# Altium PCB COMMS_ECU_revA.PcbDoc (part 5 of 6)
Units mm, origin at the board's own origin, x right, y up, seen from the top; angles counter-clockwise.
Board outline 370 x 261 mm, 6 copper layers (Top Layer, Mid Layer 1, Mid Layer 2, Mid Layer 3, Mid Layer 4, Bottom Layer), stack 1.538 mm thick; 739 components, 500 nets, 2454 pads, 325 vias.
Unrouted connection lines stored in the file: 1573.
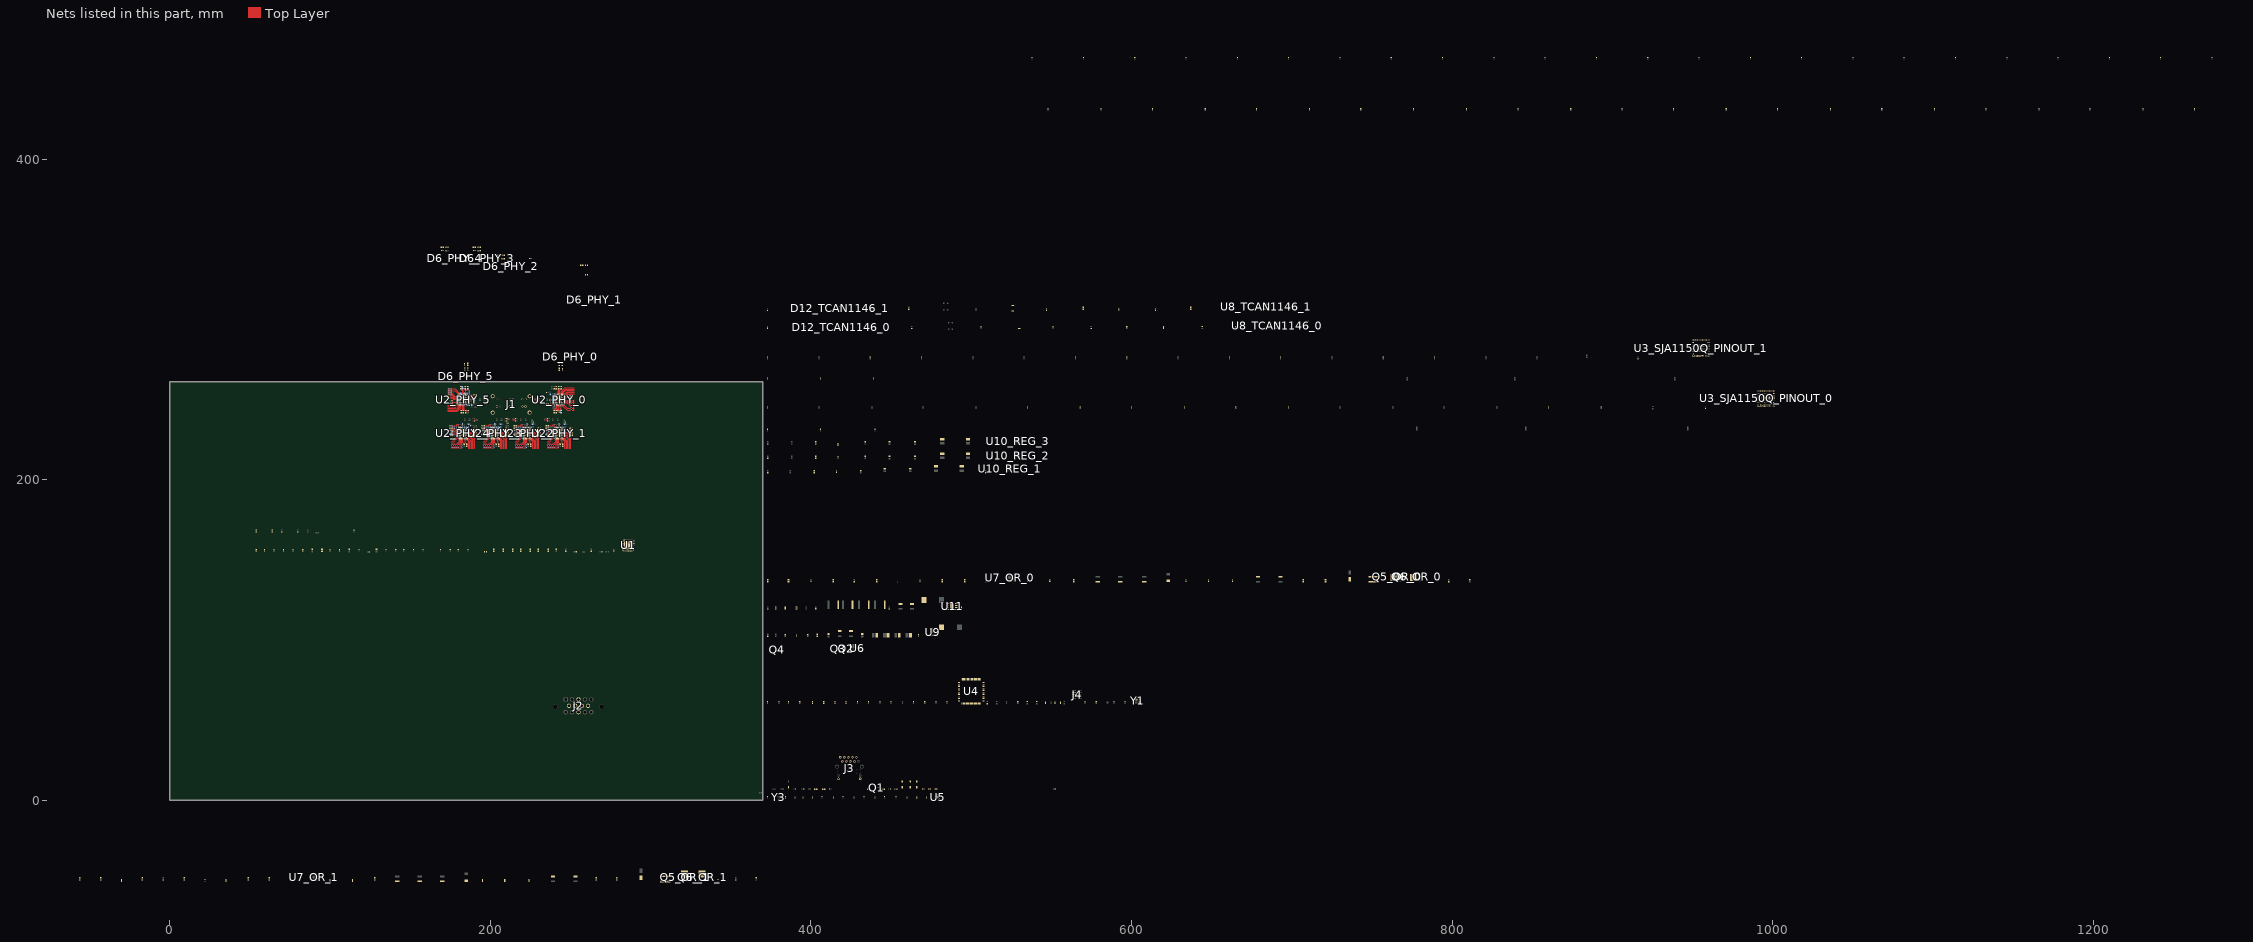
[diagram p4: the nets of this part, all layers, seen from the top]

## Via types
v1: diameter 0.5, hole 0.3, Top Layer to Bottom Layer, 319 vias
v2: diameter 0.66, hole 0.33, Top Layer to Bottom Layer, tented top, 6 vias

## Nets (pads, with @x,y where several pads share a name; then routed paths per layer and width w, separated by ;. In a path a pad name is that pad's centre, name@x,y a point inside that pad or via, vN(x,y) a via of type N, cw(c..) or ccw(c..) an arc to the next point about the centre after c; other vN are vias at no path point) (continued)
GND: C1.2 C2.2 C3.2 C4.2 C6.2 C7.2 C8.2 C9.2 C11.2 C12.2 C13.2 C14.2 C15.2 C16.2 C17.2 C18.2 C19.2 C20.2 C21.2 C22.2 C23.2 C24.2 C25.2 C26.2 C27.2 C28.2 C29.2 C30.2 C33_PHY_0.1 C33_PHY_1.1 C33_PHY_2.1 C33_PHY_3.1 C33_PHY_4.1 C33_PHY_5.1 C35_PHY_0.2 C35_PHY_1.2 C35_PHY_2.2 C35_PHY_3.2 C35_PHY_4.2 C35_PHY_5.2 C36_PHY_0.2 C36_PHY_1.2 C36_PHY_2.2 C36_PHY_3.2 C36_PHY_4.2 C36_PHY_5.2 C37_PHY_0.2 C37_PHY_1.2 C37_PHY_2.2 C37_PHY_3.2 C37_PHY_4.2 C37_PHY_5.2 C38_PHY_0.2 C38_PHY_1.2 C38_PHY_2.2 C38_PHY_3.2 C38_PHY_4.2 C38_PHY_5.2 C39_PHY_0.2 C39_PHY_1.2 C39_PHY_2.2 C39_PHY_3.2 C39_PHY_4.2 C39_PHY_5.2 C40_PHY_0.2 C40_PHY_1.2 C40_PHY_2.2 C40_PHY_3.2 C40_PHY_4.2 C40_PHY_5.2 C41_PHY_0.2 C41_PHY_1.2 C41_PHY_2.2 C41_PHY_3.2 C41_PHY_4.2 C41_PHY_5.2 C42_PHY_0.2 C42_PHY_1.2 C42_PHY_2.2 C42_PHY_3.2 C42_PHY_4.2 C42_PHY_5.2 C43_PHY_0.2 C43_PHY_1.2 C43_PHY_2.2 C43_PHY_3.2 C43_PHY_4.2 C43_PHY_5.2 C44_PHY_0.2 C44_PHY_1.2 C44_PHY_2.2 C44_PHY_3.2 C44_PHY_4.2 C44_PHY_5.2 C45_PHY_0.2 C45_PHY_1.2 C45_PHY_2.2 C45_PHY_3.2 C45_PHY_4.2 C45_PHY_5.2 C46_PHY_0.2 C46_PHY_1.2 C46_PHY_2.2 C46_PHY_3.2 C46_PHY_4.2 C46_PHY_5.2 C47_PHY_0.2 C47_PHY_1.2 C47_PHY_2.2 C47_PHY_3.2 C47_PHY_4.2 C47_PHY_5.2 C48_PHY_0.2 C48_PHY_1.2 C48_PHY_2.2 C48_PHY_3.2 C48_PHY_4.2 C48_PHY_5.2 C49_PHY_0.2 C49_PHY_1.2 C49_PHY_2.2 C49_PHY_3.2 C49_PHY_4.2 C49_PHY_5.2 C50_PHY_0.2 C50_PHY_1.2 C50_PHY_2.2 C50_PHY_3.2 C50_PHY_4.2 C50_PHY_5.2 C51_PHY_0.2 C51_PHY_1.2 C51_PHY_2.2 C51_PHY_3.2 C51_PHY_4.2 C51_PHY_5.2 C52_PHY_0.2 C52_PHY_1.2 C52_PHY_2.2 C52_PHY_3.2 C52_PHY_4.2 C52_PHY_5.2 C53_PHY_0.2 C53_PHY_1.2 C53_PHY_2.2 C53_PHY_3.2 C53_PHY_4.2 C53_PHY_5.2 C54_PHY_0.2 C54_PHY_1.2 C54_PHY_2.2 C54_PHY_3.2 C54_PHY_4.2 C54_PHY_5.2 C55_PHY_0.2 C55_PHY_1.2 C55_PHY_2.2 C55_PHY_3.2 C55_PHY_4.2 C55_PHY_5.2 C56_PHY_0.2 C56_PHY_1.2 C56_PHY_2.2 C56_PHY_3.2 C56_PHY_4.2 C56_PHY_5.2 C57_PHY_0.2 C57_PHY_1.2 C57_PHY_2.2 C57_PHY_3.2 C57_PHY_4.2 C57_PHY_5.2 C58_PHY_0.2 C58_PHY_1.2 C58_PHY_2.2 C58_PHY_3.2 C58_PHY_4.2 C58_PHY_5.2 C60_SJA1150Q_PINOUT_0.2 C60_SJA1150Q_PINOUT_1.2 C61_SJA1150Q_PINOUT_0.2 C61_SJA1150Q_PINOUT_1.2 C62_SJA1150Q_PINOUT_0.2 C62_SJA1150Q_PINOUT_1.2 C63_SJA1150Q_PINOUT_0.2 C63_SJA1150Q_PINOUT_1.2 C64_SJA1150Q_PINOUT_0.2 C64_SJA1150Q_PINOUT_1.2 C65_SJA1150Q_PINOUT_0.2 C65_SJA1150Q_PINOUT_1.2 C66_SJA1150Q_PINOUT_0.2 C66_SJA1150Q_PINOUT_1.2 C67_SJA1150Q_PINOUT_0.2 C67_SJA1150Q_PINOUT_1.2 C68_SJA1150Q_PINOUT_0.2 C68_SJA1150Q_PINOUT_1.2 C69_SJA1150Q_PINOUT_0.2 C69_SJA1150Q_PINOUT_1.2 C70_SJA1150Q_PINOUT_0.2 C70_SJA1150Q_PINOUT_1.2 C71_SJA1150Q_PINOUT_0.2 C71_SJA1150Q_PINOUT_1.2 C72_SJA1150Q_PINOUT_0.2 C72_SJA1150Q_PINOUT_1.2 C73_SJA1150Q_PINOUT_0.2 C73_SJA1150Q_PINOUT_1.2 C74_SJA1150Q_PINOUT_0.2 C74_SJA1150Q_PINOUT_1.2 C75_SJA1150Q_PINOUT_0.2 C75_SJA1150Q_PINOUT_1.2 C76_SJA1150Q_PINOUT_0.2 C76_SJA1150Q_PINOUT_1.2 C77_SJA1150Q_PINOUT_0.2 C77_SJA1150Q_PINOUT_1.2 C78_SJA1150Q_PINOUT_0.2 C78_SJA1150Q_PINOUT_1.2 C79_SJA1150Q_PINOUT_0.2 C79_SJA1150Q_PINOUT_1.2 C80_SJA1150Q_PINOUT_0.2 C80_SJA1150Q_PINOUT_1.2 C81_SJA1150Q_PINOUT_0.2 C81_SJA1150Q_PINOUT_1.2 C82_SJA1150Q_PINOUT_0.2 C82_SJA1150Q_PINOUT_1.2 C83_SJA1150Q_PINOUT_0.2 C83_SJA1150Q_PINOUT_1.2 C84_SJA1150Q_PINOUT_0.2 C84_SJA1150Q_PINOUT_1.2 C85_SJA1150Q_PINOUT_0.2 C85_SJA1150Q_PINOUT_1.2 C86_SJA1150Q_PINOUT_0.2 C86_SJA1150Q_PINOUT_1.2 C87_SJA1150Q_PINOUT_0.2 C87_SJA1150Q_PINOUT_1.2 C88_SJA1150Q_PINOUT_0.2 C88_SJA1150Q_PINOUT_1.2 C89_SJA1150Q_PINOUT_0.2 C89_SJA1150Q_PINOUT_1.2 C90_SJA1150Q_PINOUT_0.2 C90_SJA1150Q_PINOUT_1.2 C91_SJA1150Q_PINOUT_0.2 C91_SJA1150Q_PINOUT_1.2 C92_SJA1150Q_PINOUT_0.2 C92_SJA1150Q_PINOUT_1.2 C93_SJA1150Q_PINOUT_0.2 C93_SJA1150Q_PINOUT_1.2 C94_SJA1150Q_PINOUT_0.2 C94_SJA1150Q_PINOUT_1.2 C95_SJA1150Q_PINOUT_0.2 C95_SJA1150Q_PINOUT_1.2 C96_SJA1150Q_PINOUT_0.2 C96_SJA1150Q_PINOUT_1.2 C97_SJA1150Q_PINOUT_0.2 C97_SJA1150Q_PINOUT_1.2 C98_SJA1150Q_PINOUT_0.2 C98_SJA1150Q_PINOUT_1.2 C99_SJA1150Q_PINOUT_0.2 C99_SJA1150Q_PINOUT_1.2 C100_SJA1150Q_PINOUT_0.2 C100_SJA1150Q_PINOUT_1.2 C101_SJA1150Q_PINOUT_0.2 C101_SJA1150Q_PINOUT_1.2 C102_SJA1150Q_PINOUT_0.2 C102_SJA1150Q_PINOUT_1.2 C110.2 C111.2 C112.2 C113.2 C115.2 C116.2 C117.2 C118.2 C119.2 C120.2 C121.2 C122.2 C123.2 C124.2 C125.2 C126.2 C127.2 C128.2 C129.2 C130.2 C131.2 C132.2 C133.2 C134.2 C135.2 C136.2 C137.2 C138.2 C139_OR_0.1 C139_OR_1.1 C140_OR_0.2 C140_OR_1.2 C141_OR_0.2 C141_OR_1.2 C144_OR_0.2 C144_OR_1.2 C145_OR_0.1 C145_OR_1.1 C146_OR_0.1 C146_OR_1.1 C147_OR_0.1 C147_OR_1.1 C148_OR_0.1 C148_OR_1.1 C150_OR_0.2 C150_OR_1.2 C151_OR_0.1 C151_OR_1.1 C152_TCAN1146_0.2 C152_TCAN1146_1.2 C153_TCAN1146_0.2 C153_TCAN1146_1.2 C154_TCAN1146_0.2 C154_TCAN1146_1.2 C155_TCAN1146_0.2 C155_TCAN1146_1.2 C156_TCAN1146_0.2 C156_TCAN1146_1.2 C157_TCAN1146_0.1 C157_TCAN1146_1.1 C158_TCAN1146_0.1 C158_TCAN1146_1.1 C160.2 C161.2 C162.2 C163.2 C164.2 C165.2 C166.2 C167.2 C168.1 C169.1 C170_REG_1.2 C170_REG_2.2 C170_REG_3.2 C171_REG_1.2 C171_REG_2.2 C171_REG_3.2 C172_REG_1.2 C172_REG_2.2 C172_REG_3.2 C173_REG_1.2 C173_REG_2.2 C173_REG_3.2 C174_REG_1.2 C174_REG_2.2 C174_REG_3.2 C176.2 C177.2 C179.2 C180.2 C181.2 C182.2 C183.1 D4.2 D7.2 D8_OR_0.2 D8_OR_1.2 D9_OR_0.1 D9_OR_1.1 D10_OR_0.2 D10_OR_1.2 D12_TCAN1146_0.3 D12_TCAN1146_1.3 J2.6 J2.7 J2.8 J2.9 J2.12 J4.3 J4.5 Q1.2 Q4.2 R3.1 R14.1 R15.2 R16.1 R17.1 R18.1 R19.1 R20.1 R21.1 R22.2 R25_PHY_0.2 R25_PHY_1.2 R25_PHY_2.2 R25_PHY_3.2 R25_PHY_4.2 R25_PHY_5.2 R27_PHY_0.2 R27_PHY_1.2 R27_PHY_2.2 R27_PHY_3.2 R27_PHY_4.2 R27_PHY_5.2 R28_PHY_0.2 R28_PHY_1.2 R28_PHY_2.2 R28_PHY_3.2 R28_PHY_4.2 R28_PHY_5.2 R34_PHY_0.2 R34_PHY_1.2 R34_PHY_2.2 R34_PHY_3.2 R34_PHY_4.2 R34_PHY_5.2 R37_PHY_0.2 R37_PHY_1.2 R37_PHY_2.2 R37_PHY_3.2 R37_PHY_4.2 R37_PHY_5.2 R39_PHY_0.2 R39_PHY_1.2 R39_PHY_2.2 R39_PHY_3.2 R39_PHY_4.2 R39_PHY_5.2 R40_PHY_0.2 R40_PHY_1.2 R40_PHY_2.2 R40_PHY_3.2 R40_PHY_4.2 R40_PHY_5.2 R41_PHY_0.1 R41_PHY_1.1 R41_PHY_2.1 R41_PHY_3.1 R41_PHY_4.1 R41_PHY_5.1 R42_PHY_0.2 R42_PHY_1.2 R42_PHY_2.2 R42_PHY_3.2 R42_PHY_4.2 R42_PHY_5.2 R43_PHY_0.2 R43_PHY_1.2 R43_PHY_2.2 R43_PHY_3.2 R43_PHY_4.2 R43_PHY_5.2 R44_PHY_0.2 R44_PHY_1.2 R44_PHY_2.2 R44_PHY_3.2 R44_PHY_4.2 R44_PHY_5.2 R49.1 R63.1 R66.1 R68_OR_0.1 R68_OR_1.1 R75_OR_0.1 R75_OR_1.1 R76_OR_0.1 R76_OR_1.1 R77_OR_0.1 R77_OR_1.1 R78_OR_0.1 R78_OR_1.1 R80_OR_0.1 R80_OR_1.1 R85.2 R88.1 R91_REG_1.1 R91_REG_2.1 R91_REG_3.1 R93_REG_1.1 R93_REG_2.1 R93_REG_3.1 R95.1 R97.1 R98.1 R99_PHY_0.2 R99_PHY_1.2 R99_PHY_2.2 R99_PHY_3.2 R99_PHY_4.2 R99_PHY_5.2 SW2.2 SW3_TCAN1146_0.1 SW3_TCAN1146_1.1 U1.49 U2_PHY_0.49 U2_PHY_1.49 U2_PHY_2.49 U2_PHY_3.49 U2_PHY_4.49 U2_PHY_5.49 U3_SJA1150Q_PINOUT_0.A1 U3_SJA1150Q_PINOUT_0.A14 U3_SJA1150Q_PINOUT_0.B3 U3_SJA1150Q_PINOUT_0.B10 U3_SJA1150Q_PINOUT_0.B13 U3_SJA1150Q_PINOUT_0.E5 U3_SJA1150Q_PINOUT_0.E6 U3_SJA1150Q_PINOUT_0.E7 U3_SJA1150Q_PINOUT_0.E8 U3_SJA1150Q_PINOUT_0.E9 U3_SJA1150Q_PINOUT_0.E10 U3_SJA1150Q_PINOUT_0.F5 U3_SJA1150Q_PINOUT_0.F6 U3_SJA1150Q_PINOUT_0.F7 U3_SJA1150Q_PINOUT_0.F8 U3_SJA1150Q_PINOUT_0.F9 U3_SJA1150Q_PINOUT_0.F10 U3_SJA1150Q_PINOUT_0.F13 U3_SJA1150Q_PINOUT_0.G5 U3_SJA1150Q_PINOUT_0.G6 U3_SJA1150Q_PINOUT_0.G7 U3_SJA1150Q_PINOUT_0.G8 U3_SJA1150Q_PINOUT_0.G9 U3_SJA1150Q_PINOUT_0.G10 U3_SJA1150Q_PINOUT_0.H2 U3_SJA1150Q_PINOUT_0.H5 U3_SJA1150Q_PINOUT_0.H6 U3_SJA1150Q_PINOUT_0.H7 U3_SJA1150Q_PINOUT_0.H8 U3_SJA1150Q_PINOUT_0.H9 U3_SJA1150Q_PINOUT_0.H10 U3_SJA1150Q_PINOUT_0.J2 U3_SJA1150Q_PINOUT_0.J5 U3_SJA1150Q_PINOUT_0.J6 U3_SJA1150Q_PINOUT_0.J7 U3_SJA1150Q_PINOUT_0.J8 U3_SJA1150Q_PINOUT_0.J9 U3_SJA1150Q_PINOUT_0.J10 U3_SJA1150Q_PINOUT_0.K4 U3_SJA1150Q_PINOUT_0.K5 U3_SJA1150Q_PINOUT_0.K6 U3_SJA1150Q_PINOUT_0.K7 U3_SJA1150Q_PINOUT_0.K8 U3_SJA1150Q_PINOUT_0.K9 U3_SJA1150Q_PINOUT_0.K10 U3_SJA1150Q_PINOUT_0.L2 U3_SJA1150Q_PINOUT_0.L4 U3_SJA1150Q_PINOUT_0.L7 U3_SJA1150Q_PINOUT_0.N2 U3_SJA1150Q_PINOUT_0.N13 U3_SJA1150Q_PINOUT_0.P1 U3_SJA1150Q_PINOUT_0.P13 U3_SJA1150Q_PINOUT_0.P14 U3_SJA1150Q_PINOUT_1.A1 U3_SJA1150Q_PINOUT_1.A14 U3_SJA1150Q_PINOUT_1.B3 U3_SJA1150Q_PINOUT_1.B10 U3_SJA1150Q_PINOUT_1.B13 U3_SJA1150Q_PINOUT_1.E5 U3_SJA1150Q_PINOUT_1.E6 U3_SJA1150Q_PINOUT_1.E7 U3_SJA1150Q_PINOUT_1.E8 U3_SJA1150Q_PINOUT_1.E9 U3_SJA1150Q_PINOUT_1.E10 U3_SJA1150Q_PINOUT_1.F5 U3_SJA1150Q_PINOUT_1.F6 U3_SJA1150Q_PINOUT_1.F7 U3_SJA1150Q_PINOUT_1.F8 U3_SJA1150Q_PINOUT_1.F9 U3_SJA1150Q_PINOUT_1.F10 U3_SJA1150Q_PINOUT_1.F13 U3_SJA1150Q_PINOUT_1.G5 U3_SJA1150Q_PINOUT_1.G6 U3_SJA1150Q_PINOUT_1.G7 U3_SJA1150Q_PINOUT_1.G8 U3_SJA1150Q_PINOUT_1.G9 U3_SJA1150Q_PINOUT_1.G10 U3_SJA1150Q_PINOUT_1.H2 U3_SJA1150Q_PINOUT_1.H5 U3_SJA1150Q_PINOUT_1.H6 U3_SJA1150Q_PINOUT_1.H7 U3_SJA1150Q_PINOUT_1.H8 U3_SJA1150Q_PINOUT_1.H9 U3_SJA1150Q_PINOUT_1.H10 U3_SJA1150Q_PINOUT_1.J2 U3_SJA1150Q_PINOUT_1.J5 U3_SJA1150Q_PINOUT_1.J6 U3_SJA1150Q_PINOUT_1.J7 U3_SJA1150Q_PINOUT_1.J8 U3_SJA1150Q_PINOUT_1.J9 U3_SJA1150Q_PINOUT_1.J10 U3_SJA1150Q_PINOUT_1.K4 U3_SJA1150Q_PINOUT_1.K5 U3_SJA1150Q_PINOUT_1.K6 U3_SJA1150Q_PINOUT_1.K7 U3_SJA1150Q_PINOUT_1.K8 U3_SJA1150Q_PINOUT_1.K9 U3_SJA1150Q_PINOUT_1.K10 U3_SJA1150Q_PINOUT_1.L2 U3_SJA1150Q_PINOUT_1.L4 U3_SJA1150Q_PINOUT_1.L7 U3_SJA1150Q_PINOUT_1.N2 U3_SJA1150Q_PINOUT_1.N13 U3_SJA1150Q_PINOUT_1.P1 U3_SJA1150Q_PINOUT_1.P13 U3_SJA1150Q_PINOUT_1.P14 U4.10 U4.19 U4.26 U4.49 U4.74 U4.99 U5.2 U5.6 U5.10 U5.13 U5.17 U5.21 U6.5 U7_OR_0.13 U7_OR_1.13 U8_TCAN1146_0.2 U8_TCAN1146_1.2 U9.1 U9.8 U9.12 U9.15 U10_REG_1.4 U10_REG_1.9 U10_REG_2.4 U10_REG_2.9 U10_REG_3.4 U10_REG_3.9 U11.7 U11.EPAD Y1.2 Y1.4 Y3.2
  other v1: 181,227 182,227 183,227 184,227 185,227 201,227 202,227 203,227 204,227 205,227 221,227 222,227 223,227 224,227 225,227 241,227 242,227 243,227 244,227 245,227 181,228 182,228 183,228 184,228 185,228 201,228 202,228 203,228 204,228 205,228 221,228 222,228 223,228 224,228 225,228 241,228 242,228 243,228 244,228 245,228 181,229 182,229 183,229 184,229 185,229 201,229 202,229 203,229 204,229 205,229 221,229 222,229 223,229 224,229 225,229 241,229 242,229 243,229 244,229 245,229 181,230 182,230 183,230 184,230 185,230 201,230 202,230 203,230 204,230 205,230 221,230 222,230 223,230 224,230 225,230 241,230 242,230 243,230 244,230 245,230 181,231 182,231 183,231 184,231 185,231 201,231 202,231 203,231 204,231 205,231 221,231 222,231 223,231 224,231 225,231 241,231 242,231 243,231 244,231 245,231 187.75,232.75 181,248 182,248 183,248 184,248 185,248 241,248 242,248 243,248 244,248 245,248 181,249 182,249 183,249 184,249 185,249 241,249 242,249 243,249 244,249 245,249 181,250 182,250 183,250 184,250 185,250 241,250 242,250 243,250 244,250 245,250 181,251 182,251 183,251 184,251 185,251 241,251 242,251 243,251 244,251 245,251 181,252 182,252 183,252 184,252 185,252 241,252 242,252 243,252 244,252 245,252
  other v2: 523.401,207 524.601,207 528.401,215 529.601,215 528.401,224 529.601,224
HV_AUX_PWR: D3.2 J2.3 R1.2 R2.1
HV_PWR_EN: D1.1 D2.1 D3.1 D5.1 R65.1 U7_OR_0.7 U7_OR_1.7
LAN8830_ALLPHYAD: R9.2 U1.13
LAN8830_CLK125_EN: R21.2 U1.34 U3_SJA1150Q_PINOUT_1.G14
LAN8830_MODE0: R17.2 U1.33 U3_SJA1150Q_PINOUT_1.J14
LAN8830_MODE1: R18.2 U1.32 U3_SJA1150Q_PINOUT_1.H13
LAN8830_MODE2: R19.2 U1.30 U3_SJA1150Q_PINOUT_1.H14
LAN8830_MODE3: R20.2 U1.29 U3_SJA1150Q_PINOUT_1.G13
LAN8830_MODE4: R13.2 U1.36 U3_SJA1150Q_PINOUT_1.J13
LAN8830_PHYAD0: R5.1 R10.1 R14.2 U1.18
LAN8830_PHYAD1: R4.1 R11.2 R15.1 U1.16
LAN8830_PHYAD2: R12.1 R16.2 U1.15
LAN8830_TXRXA_N: J3.P3 U1.3
LAN8830_TXRXA_P: J3.P2 U1.2
LAN8830_TXRXB_N: J3.P5 U1.6
LAN8830_TXRXB_P: J3.P4 U1.5
LAN8830_TXRXC_N: J3.P8 U1.8
LAN8830_TXRXC_P: J3.P7 U1.7
LAN8830_TXRXD_N: J3.P10 U1.11
LAN8830_TXRXD_P: J3.P9 U1.10
LAN8870_LED3_PHY_0: R36_PHY_0.2 U2_PHY_0.30 | length 3.9
  Top Layer w0.2: U2_PHY_0.30@243.25,253.4 243.25,255.925 244.175,256.85 R36_PHY_0.2@244.25,256.85
LAN8870_LED3_PHY_1: R36_PHY_1.2 U2_PHY_1.30 | length 3.9
  Top Layer w0.2: U2_PHY_1.30@246.4,228.75 248.925,228.75 249.85,227.825 R36_PHY_1.2@249.85,227.75
LAN8870_LED3_PHY_2: R36_PHY_2.2 U2_PHY_2.30 | length 3.9
  Top Layer w0.2: U2_PHY_2.30@226.4,228.75 228.925,228.75 229.85,227.825 R36_PHY_2.2@229.85,227.75
LAN8870_LED3_PHY_3: R36_PHY_3.2 U2_PHY_3.30 | length 3.9
  Top Layer w0.2: U2_PHY_3.30@206.4,228.75 208.925,228.75 209.85,227.825 R36_PHY_3.2@209.85,227.75
LAN8870_LED3_PHY_4: R36_PHY_4.2 U2_PHY_4.30 | length 3.9
  Top Layer w0.2: U2_PHY_4.30@186.4,228.75 188.925,228.75 189.85,227.825 R36_PHY_4.2@189.85,227.75
LAN8870_LED3_PHY_5: R36_PHY_5.2 U2_PHY_5.30 | length 3.9
  Top Layer w0.2: R36_PHY_5.2@181.75,243.15 181.825,243.15 182.75,244.075 U2_PHY_5.30@182.75,246.6
LAN8870_LINK_LED_PHY_0: R33_PHY_0.2 U2_PHY_0.31 | length 3.5
  Top Layer w0.2: U2_PHY_0.31@242.75,253.4 R33_PHY_0.2@242.75,256.85
LAN8870_LINK_LED_PHY_1: R33_PHY_1.2 U2_PHY_1.31 | length 3.5
  Top Layer w0.2: U2_PHY_1.31@246.4,229.25 R33_PHY_1.2@249.85,229.25
LAN8870_LINK_LED_PHY_2: R33_PHY_2.2 U2_PHY_2.31 | length 3.5
  Top Layer w0.2: U2_PHY_2.31@226.4,229.25 R33_PHY_2.2@229.85,229.25
LAN8870_LINK_LED_PHY_3: R33_PHY_3.2 U2_PHY_3.31 | length 3.5
  Top Layer w0.2: U2_PHY_3.31@206.4,229.25 R33_PHY_3.2@209.85,229.25
LAN8870_LINK_LED_PHY_4: R33_PHY_4.2 U2_PHY_4.31 | length 3.5
  Top Layer w0.2: U2_PHY_4.31@186.4,229.25 R33_PHY_4.2@189.85,229.25
LAN8870_LINK_LED_PHY_5: R33_PHY_5.2 U2_PHY_5.31 | length 3.5
  Top Layer w0.2: R33_PHY_5.2@183.25,243.15 U2_PHY_5.31@183.25,246.6
LAN8870_MODE_STRP_PHY_0: R38_PHY_0.1 U2_PHY_0.18 | length 3.9
  Top Layer w0.2: U2_PHY_0.18@246.4,249.75 248.925,249.75 249.85,250.675 R38_PHY_0.1@249.85,250.75
LAN8870_MODE_STRP_PHY_1: R38_PHY_1.1 U2_PHY_1.18 | length 3.9
  Top Layer w0.2: U2_PHY_1.18@242.75,225.6 242.75,223.075 243.675,222.15 R38_PHY_1.1@243.75,222.15
LAN8870_MODE_STRP_PHY_2: R38_PHY_2.1 U2_PHY_2.18 | length 3.9
  Top Layer w0.2: U2_PHY_2.18@222.75,225.6 222.75,223.075 223.675,222.15 R38_PHY_2.1@223.75,222.15
LAN8870_MODE_STRP_PHY_3: R38_PHY_3.1 U2_PHY_3.18 | length 3.9
  Top Layer w0.2: U2_PHY_3.18@202.75,225.6 202.75,223.075 203.675,222.15 R38_PHY_3.1@203.75,222.15
LAN8870_MODE_STRP_PHY_4: R38_PHY_4.1 U2_PHY_4.18 | length 3.9
  Top Layer w0.2: U2_PHY_4.18@182.75,225.6 182.75,223.075 183.675,222.15 R38_PHY_4.1@183.75,222.15
LAN8870_MODE_STRP_PHY_5: R38_PHY_5.1 U2_PHY_5.18 | length 3.9
  Top Layer w0.2: R38_PHY_5.1@176.15,249.25 176.15,249.325 177.075,250.25 U2_PHY_5.18@179.6,250.25
LAN8870_RX_CLK_PHY_0: U2_PHY_0.16 U3_SJA1150Q_PINOUT_0.B6 | length 6.3
  Top Layer w0.156: U2_PHY_0.16@246.4,248.75 249.25,248.75 249.75,248.25 252.5,248.25
LAN8870_RX_CLK_PHY_1: U2_PHY_1.16 U3_SJA1150Q_PINOUT_0.B14 | length 6.3
  Top Layer w0.156: 241.25,219.5 241.25,222.25 241.75,222.75 U2_PHY_1.16@241.75,225.6
LAN8870_RX_CLK_PHY_2: U2_PHY_2.16 U3_SJA1150Q_PINOUT_0.J13 | length 6.3
  Top Layer w0.156: 221.25,219.5 221.25,222.25 221.75,222.75 U2_PHY_2.16@221.75,225.6
LAN8870_RX_CLK_PHY_3: U2_PHY_3.16 U3_SJA1150Q_PINOUT_0.P10 | length 6.3
  Top Layer w0.156: 201.25,219.5 201.25,222.25 201.75,222.75 U2_PHY_3.16@201.75,225.6
LAN8870_RX_CLK_PHY_4: U2_PHY_4.16 U3_SJA1150Q_PINOUT_1.B6 | length 6.3
  Top Layer w0.156: 181.25,219.5 181.25,222.25 181.75,222.75 U2_PHY_4.16@181.75,225.6
LAN8870_RX_CLK_PHY_5: U2_PHY_5.16 U3_SJA1150Q_PINOUT_1.B14 | length 6.3
  Top Layer w0.156: 173.5,251.75 176.25,251.75 176.75,251.25 U2_PHY_5.16@179.6,251.25
LAN8870_RXCTL_PHY_0: R30_PHY_0.2 R37_PHY_0.1 U2_PHY_0.17 U3_SJA1150Q_PINOUT_0.A4 | length 6.1
  Top Layer w0.156: U2_PHY_0.17@246.4,249.25 252,249.25 252.5,249.25
  other v1: 250.5,249.25
LAN8870_RXCTL_PHY_1: R30_PHY_1.2 R37_PHY_1.1 U2_PHY_1.17 U3_SJA1150Q_PINOUT_0.A11 | length 6.1
  Top Layer w0.156: 242.25,219.5 242.25,220 U2_PHY_1.17@242.25,225.6
  other v1: 242.25,221.5
LAN8870_RXCTL_PHY_2: R30_PHY_2.2 R37_PHY_2.1 U2_PHY_2.17 U3_SJA1150Q_PINOUT_0.G14 | length 6.1
  Top Layer w0.156: 222.25,219.5 222.25,220 U2_PHY_2.17@222.25,225.6
  other v1: 222.25,221.5
LAN8870_RXCTL_PHY_3: R30_PHY_3.2 R37_PHY_3.1 U2_PHY_3.17 U3_SJA1150Q_PINOUT_0.N12 | length 6.1
  Top Layer w0.156: 202.25,219.5 202.25,220 U2_PHY_3.17@202.25,225.6
  other v1: 202.25,221.5
LAN8870_RXCTL_PHY_4: R30_PHY_4.2 R37_PHY_4.1 U2_PHY_4.17 U3_SJA1150Q_PINOUT_1.A4 | length 6.1
  Top Layer w0.156: 182.25,219.5 182.25,220 U2_PHY_4.17@182.25,225.6
  other v1: 182.25,221.5
LAN8870_RXCTL_PHY_5: R30_PHY_5.2 R37_PHY_5.1 U2_PHY_5.17 U3_SJA1150Q_PINOUT_1.A11 | length 6.1
  Top Layer w0.156: 173.5,250.75 174,250.75 U2_PHY_5.17@179.6,250.75
  other v1: 175.5,250.75
LAN8870_RXD0_PHY_0: R35_PHY_0.1 R39_PHY_0.1 U2_PHY_0.11 U3_SJA1150Q_PINOUT_0.A6 | length 9
  Top Layer w0.156: U2_PHY_0.11@245.25,246.6 245.25,246 248,243.25 v1(250.5,243.25) 252.5,243.25
LAN8870_RXD0_PHY_1: R35_PHY_1.1 R39_PHY_1.1 U2_PHY_1.11 U3_SJA1150Q_PINOUT_0.A13 | length 9
  Top Layer w0.156: 236.25,219.5 v1(236.25,221.5) 236.25,224 239,226.75 U2_PHY_1.11@239.6,226.75
LAN8870_RXD0_PHY_2: R35_PHY_2.1 R39_PHY_2.1 U2_PHY_2.11 U3_SJA1150Q_PINOUT_0.J14 | length 9
  Top Layer w0.156: 216.25,219.5 v1(216.25,221.5) 216.25,224 219,226.75 U2_PHY_2.11@219.6,226.75
LAN8870_RXD0_PHY_3: R35_PHY_3.1 R39_PHY_3.1 U2_PHY_3.11 U3_SJA1150Q_PINOUT_0.N10 | length 9
  Top Layer w0.156: 196.25,219.5 v1(196.25,221.5) 196.25,224 199,226.75 U2_PHY_3.11@199.6,226.75
LAN8870_RXD0_PHY_4: R35_PHY_4.1 R39_PHY_4.1 U2_PHY_4.11 U3_SJA1150Q_PINOUT_1.A6 | length 9
  Top Layer w0.156: 176.25,219.5 v1(176.25,221.5) 176.25,224 179,226.75 U2_PHY_4.11@179.6,226.75
LAN8870_RXD0_PHY_5: R35_PHY_5.1 R39_PHY_5.1 U2_PHY_5.11 U3_SJA1150Q_PINOUT_1.A13 | length 9
  Top Layer w0.156: 173.5,256.75 v1(175.5,256.75) 178,256.75 180.75,254 U2_PHY_5.11@180.75,253.4
LAN8870_RXD1_PHY_0: R32_PHY_0.1 R99_PHY_0.1 U2_PHY_0.12 U3_SJA1150Q_PINOUT_0.B5 | length 7.7
  Top Layer w0.156: U2_PHY_0.12@245.75,246.6 245.75,246.395 245.793,246.352 245.998,246.352 247.85,244.5 252.5,244.5
  other v1: 250.5,244.5
LAN8870_RXD1_PHY_1: R32_PHY_1.1 R99_PHY_1.1 U2_PHY_1.12 U3_SJA1150Q_PINOUT_0.B12 | length 7.7
  Top Layer w0.156: 237.5,219.5 237.5,224.15 239.352,226.002 239.352,226.207 239.395,226.25 U2_PHY_1.12@239.6,226.25
  other v1: 237.5,221.5
LAN8870_RXD1_PHY_2: R32_PHY_2.1 R99_PHY_2.1 U2_PHY_2.12 U3_SJA1150Q_PINOUT_0.H13 | length 7.7
  Top Layer w0.156: 217.5,219.5 217.5,224.15 219.352,226.002 219.352,226.207 219.395,226.25 U2_PHY_2.12@219.6,226.25
  other v1: 217.5,221.5
LAN8870_RXD1_PHY_3: R32_PHY_3.1 R99_PHY_3.1 U2_PHY_3.12 U3_SJA1150Q_PINOUT_0.P11 | length 7.7
  Top Layer w0.156: 197.5,219.5 197.5,224.15 199.352,226.002 199.352,226.207 199.395,226.25 U2_PHY_3.12@199.6,226.25
  other v1: 197.5,221.5
LAN8870_RXD1_PHY_4: R32_PHY_4.1 R99_PHY_4.1 U2_PHY_4.12 U3_SJA1150Q_PINOUT_1.B5 | length 7.7
  Top Layer w0.156: 177.5,219.5 177.5,224.15 179.352,226.002 179.352,226.207 179.395,226.25 U2_PHY_4.12@179.6,226.25
  other v1: 177.5,221.5
LAN8870_RXD1_PHY_5: R32_PHY_5.1 R99_PHY_5.1 U2_PHY_5.12 U3_SJA1150Q_PINOUT_1.B12 | length 7.7
  Top Layer w0.156: 173.5,255.5 178.15,255.5 180.002,253.648 180.207,253.648 180.25,253.605 U2_PHY_5.12@180.25,253.4
  other v1: 175.5,255.5
LAN8870_RXD2_PHY_0: R31_PHY_0.1 R34_PHY_0.1 U2_PHY_0.14 U3_SJA1150Q_PINOUT_0.A5 | length 6.9
  Top Layer w0.156: U2_PHY_0.14@246.4,247.75 248.25,247.75 250.25,245.75 252.5,245.75
  other v1: 250.5,245.75
LAN8870_RXD2_PHY_1: R31_PHY_1.1 R34_PHY_1.1 U2_PHY_1.14 U3_SJA1150Q_PINOUT_0.A12 | length 6.9
  Top Layer w0.156: 238.75,219.5 238.75,221.75 240.75,223.75 U2_PHY_1.14@240.75,225.6
  other v1: 238.75,221.5
LAN8870_RXD2_PHY_2: R31_PHY_2.1 R34_PHY_2.1 U2_PHY_2.14 U3_SJA1150Q_PINOUT_0.H14 | length 6.9
  Top Layer w0.156: 218.75,219.5 218.75,221.75 220.75,223.75 U2_PHY_2.14@220.75,225.6
  other v1: 218.75,221.5
LAN8870_RXD2_PHY_3: R31_PHY_3.1 R34_PHY_3.1 U2_PHY_3.14 U3_SJA1150Q_PINOUT_0.N11 | length 6.9
  Top Layer w0.156: 198.75,219.5 198.75,221.75 200.75,223.75 U2_PHY_3.14@200.75,225.6
  other v1: 198.75,221.5
LAN8870_RXD2_PHY_4: R31_PHY_4.1 R34_PHY_4.1 U2_PHY_4.14 U3_SJA1150Q_PINOUT_1.A5 | length 6.9
  Top Layer w0.156: 178.75,219.5 178.75,221.75 180.75,223.75 U2_PHY_4.14@180.75,225.6
  other v1: 178.75,221.5
LAN8870_RXD2_PHY_5: R31_PHY_5.1 R34_PHY_5.1 U2_PHY_5.14 U3_SJA1150Q_PINOUT_1.A12 | length 6.9
  Top Layer w0.156: 173.5,254.25 175.75,254.25 177.75,252.25 U2_PHY_5.14@179.6,252.25
  other v1: 175.5,254.25
LAN8870_RXD3_PHY_0: R41_PHY_0.2 U2_PHY_0.15 U3_SJA1150Q_PINOUT_0.B4 | length 6.6
  Top Layer w0.156: U2_PHY_0.15@246.4,248.25 248.75,248.25 250,247 v1(250.5,247) 252.5,247
LAN8870_RXD3_PHY_1: R41_PHY_1.2 U2_PHY_1.15 U3_SJA1150Q_PINOUT_0.B11 | length 6.6
  Top Layer w0.156: 240,219.5 v1(240,221.5) 240,222 241.25,223.25 U2_PHY_1.15@241.25,225.6
LAN8870_RXD3_PHY_2: R41_PHY_2.2 U2_PHY_2.15 U3_SJA1150Q_PINOUT_0.G13 | length 6.6
  Top Layer w0.156: 220,219.5 v1(220,221.5) 220,222 221.25,223.25 U2_PHY_2.15@221.25,225.6
LAN8870_RXD3_PHY_3: R41_PHY_3.2 U2_PHY_3.15 U3_SJA1150Q_PINOUT_0.P12 | length 6.6
  Top Layer w0.156: 200,219.5 v1(200,221.5) 200,222 201.25,223.25 U2_PHY_3.15@201.25,225.6
LAN8870_RXD3_PHY_4: R41_PHY_4.2 U2_PHY_4.15 U3_SJA1150Q_PINOUT_1.B4 | length 6.6
  Top Layer w0.156: 180,219.5 v1(180,221.5) 180,222 181.25,223.25 U2_PHY_4.15@181.25,225.6
LAN8870_RXD3_PHY_5: R41_PHY_5.2 U2_PHY_5.15 U3_SJA1150Q_PINOUT_1.B11 | length 6.6
  Top Layer w0.156: 173.5,253 v1(175.5,253) 176,253 177.25,251.75 U2_PHY_5.15@179.6,251.75
LAN8870_SPEED_SEL_PHY_0: R29_PHY_0.1 R40_PHY_0.1 U2_PHY_0.32 | length 5.6
  Top Layer w0.2: R29_PHY_0.1@239.75,256.85 R40_PHY_0.1@241.25,256.85 241.47,256.63 241.87,256.63 242.25,256.25 U2_PHY_0.32@242.25,253.4
LAN8870_SPEED_SEL_PHY_1: R29_PHY_1.1 R40_PHY_1.1 U2_PHY_1.32 | length 5.6
  Top Layer w0.2: U2_PHY_1.32@246.4,229.75 249.25,229.75 249.63,230.13 249.63,230.53 R40_PHY_1.1@249.85,230.75 R29_PHY_1.1@249.85,232.25
LAN8870_SPEED_SEL_PHY_2: R29_PHY_2.1 R40_PHY_2.1 U2_PHY_2.32 | length 5.6
  Top Layer w0.2: U2_PHY_2.32@226.4,229.75 229.25,229.75 229.63,230.13 229.63,230.53 R40_PHY_2.1@229.85,230.75 R29_PHY_2.1@229.85,232.25
LAN8870_SPEED_SEL_PHY_3: R29_PHY_3.1 R40_PHY_3.1 U2_PHY_3.32 | length 5.6
  Top Layer w0.2: U2_PHY_3.32@206.4,229.75 209.25,229.75 209.63,230.13 209.63,230.53 R40_PHY_3.1@209.85,230.75 R29_PHY_3.1@209.85,232.25
LAN8870_SPEED_SEL_PHY_4: R29_PHY_4.1 R40_PHY_4.1 U2_PHY_4.32 | length 5.6
  Top Layer w0.2: U2_PHY_4.32@186.4,229.75 189.25,229.75 189.63,230.13 189.63,230.53 R40_PHY_4.1@189.85,230.75 R29_PHY_4.1@189.85,232.25
LAN8870_SPEED_SEL_PHY_5: R29_PHY_5.1 R40_PHY_5.1 U2_PHY_5.32 | length 5.6
  Top Layer w0.2: U2_PHY_5.32@183.75,246.6 183.75,243.75 184.13,243.37 184.53,243.37 R40_PHY_5.1@184.75,243.15 R29_PHY_5.1@186.25,243.15
LAN8870_TX_CLK_PHY_0: U2_PHY_0.23 U3_SJA1150Q_PINOUT_0.A7 | length 6.6
  Top Layer w0.156: U2_PHY_0.23@246.4,252.25 247,252.25 248.25,253.5 252.5,253.5
LAN8870_TX_CLK_PHY_1: U2_PHY_1.23 U3_SJA1150Q_PINOUT_0.C14 | length 6.6
  Top Layer w0.156: U2_PHY_1.23@245.25,225.6 245.25,225 246.5,223.75 246.5,219.5
LAN8870_TX_CLK_PHY_2: U2_PHY_2.23 U3_SJA1150Q_PINOUT_0.K14 | length 6.6
  Top Layer w0.156: U2_PHY_2.23@225.25,225.6 225.25,225 226.5,223.75 226.5,219.5
LAN8870_TX_CLK_PHY_3: U2_PHY_3.23 U3_SJA1150Q_PINOUT_0.N9 | length 6.6
  Top Layer w0.156: U2_PHY_3.23@205.25,225.6 205.25,225 206.5,223.75 206.5,219.5
LAN8870_TX_CLK_PHY_4: U2_PHY_4.23 U3_SJA1150Q_PINOUT_1.A7 | length 6.6
  Top Layer w0.156: U2_PHY_4.23@185.25,225.6 185.25,225 186.5,223.75 186.5,219.5
LAN8870_TX_CLK_PHY_5: U2_PHY_5.23 U3_SJA1150Q_PINOUT_1.C14 | length 6.6
  Top Layer w0.156: 173.5,246.5 177.75,246.5 179,247.75 U2_PHY_5.23@179.6,247.75
LAN8870_TX_CTL_PHY_0: U2_PHY_0.24 U3_SJA1150Q_PINOUT_0.B7 | length 6.7
  Top Layer w0.156: U2_PHY_0.24@246.4,252.75 246.7,252.75 248.2,254.25 252.5,254.25
LAN8870_TX_CTL_PHY_1: U2_PHY_1.24 U3_SJA1150Q_PINOUT_0.C13 | length 6.7
  Top Layer w0.156: U2_PHY_1.24@245.75,225.6 245.75,225.3 247.25,223.8 247.25,219.5
LAN8870_TX_CTL_PHY_2: U2_PHY_2.24 U3_SJA1150Q_PINOUT_0.K13 | length 6.7
  Top Layer w0.156: U2_PHY_2.24@225.75,225.6 225.75,225.3 227.25,223.8 227.25,219.5
LAN8870_TX_CTL_PHY_3: U2_PHY_3.24 U3_SJA1150Q_PINOUT_0.P9 | length 6.7
  Top Layer w0.156: U2_PHY_3.24@205.75,225.6 205.75,225.3 207.25,223.8 207.25,219.5
LAN8870_TX_CTL_PHY_4: U2_PHY_4.24 U3_SJA1150Q_PINOUT_1.B7 | length 6.7
  Top Layer w0.156: U2_PHY_4.24@185.75,225.6 185.75,225.3 187.25,223.8 187.25,219.5
LAN8870_TX_CTL_PHY_5: U2_PHY_5.24 U3_SJA1150Q_PINOUT_1.C13 | length 6.7
  Top Layer w0.156: 173.5,245.75 177.8,245.75 179.3,247.25 U2_PHY_5.24@179.6,247.25
LAN8870_TXD0_PHY_0: U2_PHY_0.25 U3_SJA1150Q_PINOUT_0.B9 | length 7.4
  Top Layer w0.156: U2_PHY_0.25@245.75,253.4 246.4,253.4 248,255 252.5,255
LAN8870_TXD0_PHY_1: U2_PHY_1.25 U3_SJA1150Q_PINOUT_0.E13 | length 7.4
  Top Layer w0.156: U2_PHY_1.25@246.4,226.25 246.4,225.6 248,224 248,219.5
LAN8870_TXD0_PHY_2: U2_PHY_2.25 U3_SJA1150Q_PINOUT_0.M13 | length 7.4
  Top Layer w0.156: U2_PHY_2.25@226.4,226.25 226.4,225.6 228,224 228,219.5
LAN8870_TXD0_PHY_3: U2_PHY_3.25 U3_SJA1150Q_PINOUT_0.P7 | length 7.4
  Top Layer w0.156: U2_PHY_3.25@206.4,226.25 206.4,225.6 208,224 208,219.5
LAN8870_TXD0_PHY_4: U2_PHY_4.25 U3_SJA1150Q_PINOUT_1.B9 | length 7.4
  Top Layer w0.156: U2_PHY_4.25@186.4,226.25 186.4,225.6 188,224 188,219.5
LAN8870_TXD0_PHY_5: U2_PHY_5.25 U3_SJA1150Q_PINOUT_1.E13 | length 7.4
  Top Layer w0.156: 173.5,245 178,245 179.6,246.6 U2_PHY_5.25@180.25,246.6
LAN8870_TXD1_PHY_0: U2_PHY_0.26 U3_SJA1150Q_PINOUT_0.A9 | length 8.6
  Top Layer w0.156: U2_PHY_0.26@245.25,253.4 245.25,254 247,255.75 252.5,255.75
LAN8870_TXD1_PHY_1: U2_PHY_1.26 U3_SJA1150Q_PINOUT_0.E14 | length 8.6
  Top Layer w0.156: U2_PHY_1.26@246.4,226.75 247,226.75 248.75,225 248.75,219.5
LAN8870_TXD1_PHY_2: U2_PHY_2.26 U3_SJA1150Q_PINOUT_0.M14 | length 8.6
  Top Layer w0.156: U2_PHY_2.26@226.4,226.75 227,226.75 228.75,225 228.75,219.5
LAN8870_TXD1_PHY_3: U2_PHY_3.26 U3_SJA1150Q_PINOUT_0.N7 | length 8.6
  Top Layer w0.156: U2_PHY_3.26@206.4,226.75 207,226.75 208.75,225 208.75,219.5
LAN8870_TXD1_PHY_4: U2_PHY_4.26 U3_SJA1150Q_PINOUT_1.A9 | length 8.6
  Top Layer w0.156: U2_PHY_4.26@186.4,226.75 187,226.75 188.75,225 188.75,219.5
LAN8870_TXD1_PHY_5: U2_PHY_5.26 U3_SJA1150Q_PINOUT_1.E14 | length 8.6
  Top Layer w0.156: 173.5,244.25 179,244.25 180.75,246 U2_PHY_5.26@180.75,246.6
LAN8870_TXD2_PHY_0: U2_PHY_0.27 U3_SJA1150Q_PINOUT_0.B8 | length 9.7
  Top Layer w0.156: U2_PHY_0.27@244.75,253.4 244.75,254.5 246.75,256.5 252.5,256.5
LAN8870_TXD2_PHY_1: U2_PHY_1.27 U3_SJA1150Q_PINOUT_0.D13 | length 9.7
  Top Layer w0.156: U2_PHY_1.27@246.4,227.25 247.5,227.25 249.5,225.25 249.5,219.5
LAN8870_TXD2_PHY_2: U2_PHY_2.27 U3_SJA1150Q_PINOUT_0.L13 | length 9.7
  Top Layer w0.156: U2_PHY_2.27@226.4,227.25 227.5,227.25 229.5,225.25 229.5,219.5
LAN8870_TXD2_PHY_3: U2_PHY_3.27 U3_SJA1150Q_PINOUT_0.P8 | length 9.7
  Top Layer w0.156: U2_PHY_3.27@206.4,227.25 207.5,227.25 209.5,225.25 209.5,219.5
LAN8870_TXD2_PHY_4: U2_PHY_4.27 U3_SJA1150Q_PINOUT_1.B8 | length 9.7
  Top Layer w0.156: U2_PHY_4.27@186.4,227.25 187.5,227.25 189.5,225.25 189.5,219.5
LAN8870_TXD2_PHY_5: U2_PHY_5.27 U3_SJA1150Q_PINOUT_1.D13 | length 9.7
  Top Layer w0.156: 173.5,243.5 179.25,243.5 181.25,245.5 U2_PHY_5.27@181.25,246.6
LAN8870_TXD3_PHY_0: U2_PHY_0.28 U3_SJA1150Q_PINOUT_0.A8 | length 10.8
  Top Layer w0.156: U2_PHY_0.28@244.25,253.4 244.25,255 246.5,257.25 252.5,257.25
LAN8870_TXD3_PHY_1: U2_PHY_1.28 U3_SJA1150Q_PINOUT_0.D14 | length 10.8
  Top Layer w0.156: U2_PHY_1.28@246.4,227.75 248,227.75 250.25,225.5 250.25,219.5
LAN8870_TXD3_PHY_2: U2_PHY_2.28 U3_SJA1150Q_PINOUT_0.L14 | length 10.8
  Top Layer w0.156: U2_PHY_2.28@226.4,227.75 228,227.75 230.25,225.5 230.25,219.5
LAN8870_TXD3_PHY_3: U2_PHY_3.28 U3_SJA1150Q_PINOUT_0.N8 | length 10.8
  Top Layer w0.156: U2_PHY_3.28@206.4,227.75 208,227.75 210.25,225.5 210.25,219.5
LAN8870_TXD3_PHY_4: U2_PHY_4.28 U3_SJA1150Q_PINOUT_1.A8 | length 10.8
  Top Layer w0.156: U2_PHY_4.28@186.4,227.75 188,227.75 190.25,225.5 190.25,219.5
LAN8870_TXD3_PHY_5: U2_PHY_5.28 U3_SJA1150Q_PINOUT_1.D14 | length 10.8
  Top Layer w0.156: 173.5,242.75 179.5,242.75 181.75,245 U2_PHY_5.28@181.75,246.6
LAN8870_VBAT_PHY_0: C53_PHY_0.1 C54_PHY_0.1 FB11_PHY_0.2 U2_PHY_0.1
  other v1: 240.25,245
LAN8870_VBAT_PHY_1: C53_PHY_1.1 C54_PHY_1.1 FB11_PHY_1.2 U2_PHY_1.1
  other v1: 238,231.75
LAN8870_VBAT_PHY_2: C53_PHY_2.1 C54_PHY_2.1 FB11_PHY_2.2 U2_PHY_2.1
  other v1: 218,231.75
LAN8870_VBAT_PHY_3: C53_PHY_3.1 C54_PHY_3.1 FB11_PHY_3.2 U2_PHY_3.1
  other v1: 198,231.75
LAN8870_VBAT_PHY_4: C53_PHY_4.1 C54_PHY_4.1 FB11_PHY_4.2 U2_PHY_4.1
  other v1: 178,231.75
LAN8870_VBAT_PHY_5: C53_PHY_5.1 C54_PHY_5.1 FB11_PHY_5.2 U2_PHY_5.1
  other v1: 185.75,255
LAN8870_VDDA_PHY_0: C48_PHY_0.1 C49_PHY_0.1 C50_PHY_0.1 C51_PHY_0.1 C52_PHY_0.1 FB6_PHY_0.1 FB10_PHY_0.2 U2_PHY_0.37 U2_PHY_0.41 U2_PHY_0.45 U2_PHY_0.48
  other v1: 238,246.75 238,248.5 238,250.75 238,252.75
LAN8870_VDDA_PHY_1: C48_PHY_1.1 C49_PHY_1.1 C50_PHY_1.1 C51_PHY_1.1 C52_PHY_1.1 FB6_PHY_1.1 FB10_PHY_1.2 U2_PHY_1.37 U2_PHY_1.41 U2_PHY_1.45 U2_PHY_1.48
  other v1: 239.75,234 241.5,234 243.75,234 245.75,234
LAN8870_VDDA_PHY_2: C48_PHY_2.1 C49_PHY_2.1 C50_PHY_2.1 C51_PHY_2.1 C52_PHY_2.1 FB6_PHY_2.1 FB10_PHY_2.2 U2_PHY_2.37 U2_PHY_2.41 U2_PHY_2.45 U2_PHY_2.48
  other v1: 219.75,234 221.5,234 223.75,234 225.75,234
LAN8870_VDDA_PHY_3: C48_PHY_3.1 C49_PHY_3.1 C50_PHY_3.1 C51_PHY_3.1 C52_PHY_3.1 FB6_PHY_3.1 FB10_PHY_3.2 U2_PHY_3.37 U2_PHY_3.41 U2_PHY_3.45 U2_PHY_3.48
  other v1: 199.75,234 201.5,234 203.75,234 205.75,234
LAN8870_VDDA_PHY_4: C48_PHY_4.1 C49_PHY_4.1 C50_PHY_4.1 C51_PHY_4.1 C52_PHY_4.1 FB6_PHY_4.1 FB10_PHY_4.2 U2_PHY_4.37 U2_PHY_4.41 U2_PHY_4.45 U2_PHY_4.48
  other v1: 179.75,234 181.5,234 183.75,234 185.75,234
LAN8870_VDDA_PHY_5: C48_PHY_5.1 C49_PHY_5.1 C50_PHY_5.1 C51_PHY_5.1 C52_PHY_5.1 FB6_PHY_5.1 FB10_PHY_5.2 U2_PHY_5.37 U2_PHY_5.41 U2_PHY_5.45 U2_PHY_5.48
  other v1: 188,247.25 188,249.25 188,251.5 188,253.25
LM61495Q3_VCC: C169.2 R86.1 U9.6 U9.9
LM74910H_ISCP_OR_0: C149_OR_0.1 R70_OR_0.1 U7_OR_0.18
LM74910H_ISCP_OR_1: C149_OR_1.1 R70_OR_1.1 U7_OR_1.18
LM74910H_VS_OR_0: C143_OR_0.1 C144_OR_0.1 Q5_OR_0.5-6-7-8 R67_OR_0.2 R69_OR_0.1 R70_OR_0.2 R71_OR_0.2 U7_OR_0.6 U7_OR_0.22 U7_OR_0.24
LM74910H_VS_OR_1: C143_OR_1.1 C144_OR_1.1 Q5_OR_1.5-6-7-8 R67_OR_1.2 R69_OR_1.1 R70_OR_1.2 R71_OR_1.2 U7_OR_1.6 U7_OR_1.22 U7_OR_1.24
NetC5_1: C5.1 J3.P6
NetC10_1: C10.1 U1.46
NetC23_1: C23.1 C24.1 FB3.2 U1.47
NetC25_1: C25.1 C26.1 C27.1 FB4.2 U1.1 U1.12
NetC28_1: C28.1 C29.1 C30.1 FB5.2 U1.4 U1.9
NetC33_PHY_0_2: C33_PHY_0.2 R23_PHY_0.1 R24_PHY_0.1 R25_PHY_0.1
NetC33_PHY_1_2: C33_PHY_1.2 R23_PHY_1.1 R24_PHY_1.1 R25_PHY_1.1
NetC33_PHY_2_2: C33_PHY_2.2 R23_PHY_2.1 R24_PHY_2.1 R25_PHY_2.1
NetC33_PHY_3_2: C33_PHY_3.2 R23_PHY_3.1 R24_PHY_3.1 R25_PHY_3.1
NetC33_PHY_4_2: C33_PHY_4.2 R23_PHY_4.1 R24_PHY_4.1 R25_PHY_4.1
NetC33_PHY_5_2: C33_PHY_5.2 R23_PHY_5.1 R24_PHY_5.1 R25_PHY_5.1
NetC34_PHY_0_1: C34_PHY_0.1 U2_PHY_0.6 | length 3.6
  Top Layer w0.156: C34_PHY_0.1@242.75,242.979 U2_PHY_0.6@242.75,246.6
NetC34_PHY_1_1: C34_PHY_1.1 U2_PHY_1.6 | length 3.6
  Top Layer w0.156: C34_PHY_1.1@235.979,229.25 U2_PHY_1.6@239.6,229.25
NetC34_PHY_2_1: C34_PHY_2.1 U2_PHY_2.6 | length 3.6
  Top Layer w0.156: C34_PHY_2.1@215.979,229.25 U2_PHY_2.6@219.6,229.25
NetC34_PHY_3_1: C34_PHY_3.1 U2_PHY_3.6 | length 3.6
  Top Layer w0.156: C34_PHY_3.1@195.979,229.25 U2_PHY_3.6@199.6,229.25
NetC34_PHY_4_1: C34_PHY_4.1 U2_PHY_4.6 | length 3.6
  Top Layer w0.156: C34_PHY_4.1@175.979,229.25 U2_PHY_4.6@179.6,229.25
NetC34_PHY_5_1: C34_PHY_5.1 U2_PHY_5.6 | length 3.7
  Top Layer w0.156: C34_PHY_5.1@183,257 183.25,256.75 U2_PHY_5.6@183.25,253.4
NetC36_PHY_0_1: C36_PHY_0.1 C37_PHY_0.1 FB6_PHY_0.2 U2_PHY_0.9
  other v1: 244,245
NetC36_PHY_1_1: C36_PHY_1.1 C37_PHY_1.1 FB6_PHY_1.2 U2_PHY_1.9
  other v1: 238,228
NetC36_PHY_2_1: C36_PHY_2.1 C37_PHY_2.1 FB6_PHY_2.2 U2_PHY_2.9
  other v1: 218,228
NetC36_PHY_3_1: C36_PHY_3.1 C37_PHY_3.1 FB6_PHY_3.2 U2_PHY_3.9
  other v1: 198,228
NetC36_PHY_4_1: C36_PHY_4.1 C37_PHY_4.1 FB6_PHY_4.2 U2_PHY_4.9
  other v1: 178,228
NetC36_PHY_5_1: C36_PHY_5.1 C37_PHY_5.1 FB6_PHY_5.2 U2_PHY_5.9
  other v1: 182,255
NetC42_PHY_0_1: C42_PHY_0.1 C43_PHY_0.1 C44_PHY_0.1 C45_PHY_0.1 FB8_PHY_0.2 U2_PHY_0.5 U2_PHY_0.44 U2_PHY_0.46
  other v1: 242.25,245 238,247.75 238,249.25
NetC42_PHY_1_1: C42_PHY_1.1 C43_PHY_1.1 C44_PHY_1.1 C45_PHY_1.1 FB8_PHY_1.2 U2_PHY_1.5 U2_PHY_1.44 U2_PHY_1.46
  other v1: 238,229.75 240.75,234 242.25,234
NetC42_PHY_2_1: C42_PHY_2.1 C43_PHY_2.1 C44_PHY_2.1 C45_PHY_2.1 FB8_PHY_2.2 U2_PHY_2.5 U2_PHY_2.44 U2_PHY_2.46
  other v1: 218,229.75 220.75,234 222.25,234
NetC42_PHY_3_1: C42_PHY_3.1 C43_PHY_3.1 C44_PHY_3.1 C45_PHY_3.1 FB8_PHY_3.2 U2_PHY_3.5 U2_PHY_3.44 U2_PHY_3.46
  other v1: 198,229.75 200.75,234 202.25,234
NetC42_PHY_4_1: C42_PHY_4.1 C43_PHY_4.1 C44_PHY_4.1 C45_PHY_4.1 FB8_PHY_4.2 U2_PHY_4.5 U2_PHY_4.44 U2_PHY_4.46
  other v1: 178,229.75 180.75,234 182.25,234
NetC42_PHY_5_1: C42_PHY_5.1 C43_PHY_5.1 C44_PHY_5.1 C45_PHY_5.1 FB8_PHY_5.2 U2_PHY_5.5 U2_PHY_5.44 U2_PHY_5.46
  other v1: 188,250.75 188,252.25 183.75,255
NetC59_SJA1150Q_PINOUT_0_1: C59_SJA1150Q_PINOUT_0.1 U3_SJA1150Q_PINOUT_0.K2
NetC59_SJA1150Q_PINOUT_1_1: C59_SJA1150Q_PINOUT_1.1 U3_SJA1150Q_PINOUT_1.K2
NetC124_1: C124.1 C125.1 U4.48
NetC126_1: C126.1 C127.1 U4.73
NetC142_OR_0_1: C142_OR_0.1 R71_OR_0.1 U7_OR_0.20
NetC142_OR_0_2: C142_OR_0.2 C149_OR_0.2 Q6_OR_0.5-6-7-8 R69_OR_0.2 U7_OR_0.19
NetC142_OR_1_1: C142_OR_1.1 R71_OR_1.1 U7_OR_1.20
NetC142_OR_1_2: C142_OR_1.2 C149_OR_1.2 Q6_OR_1.5-6-7-8 R69_OR_1.2 U7_OR_1.19
NetC143_OR_0_2: C143_OR_0.2 U7_OR_0.23
NetC143_OR_1_2: C143_OR_1.2 U7_OR_1.23
NetC148_OR_0_2: C148_OR_0.2 R72_OR_0.1
NetC148_OR_1_2: C148_OR_1.2 R72_OR_1.1
NetC150_OR_0_1: C150_OR_0.1 R74_OR_0.1 R75_OR_0.2 U7_OR_0.4
NetC150_OR_1_1: C150_OR_1.1 R74_OR_1.1 R75_OR_1.2 U7_OR_1.4
NetC151_OR_0_2: C151_OR_0.2 R76_OR_0.2 U7_OR_0.9
NetC151_OR_1_2: C151_OR_1.2 R76_OR_1.2 U7_OR_1.9
NetC154_TCAN1146_0_1: C154_TCAN1146_0.1 D11_TCAN1146_0.1 R81_TCAN1146_0.2 U8_TCAN1146_0.10
NetC154_TCAN1146_1_1: C154_TCAN1146_1.1 D11_TCAN1146_1.1 R81_TCAN1146_1.2 U8_TCAN1146_1.10
NetC155_TCAN1146_1_1: C155_TCAN1146_1.1 R81_TCAN1146_1.1 R82_TCAN1146_1.2 SW3_TCAN1146_1.2
NetC157_TCAN1146_0_2: C157_TCAN1146_0.2 R83_TCAN1146_0.1 R84_TCAN1146_0.2
NetC157_TCAN1146_1_2: C157_TCAN1146_1.2 R83_TCAN1146_1.1 R84_TCAN1146_1.2
NetC159_1: C159.1 U9.3 U9.4
NetC159_2: C159.2 L3.1 U9.16
NetC174_REG_1_1: C174_REG_1.1 U10_REG_1.6
NetC174_REG_2_1: C174_REG_2.1 U10_REG_2.6
NetC174_REG_3_1: C174_REG_3.1 U10_REG_3.6
NetC175_1: C175.1 U11.1
NetC175_2: C175.2 L4.1 U11.8
NetC178_1: C178.1 R94.1 R97.2 U11.5
NetC183_2: C183.2 U11.6
NetD1_2: D1.2 U8_TCAN1146_0.7
NetD2_2: D2.2 U8_TCAN1146_1.7
NetD6_PHY_0_1: D6_PHY_0.1 R33_PHY_0.1
NetD6_PHY_0_4: D6_PHY_0.4 R36_PHY_0.1
NetD6_PHY_1_1: D6_PHY_1.1 R33_PHY_1.1
NetD6_PHY_1_4: D6_PHY_1.4 R36_PHY_1.1
NetD6_PHY_2_1: D6_PHY_2.1 R33_PHY_2.1
NetD6_PHY_2_4: D6_PHY_2.4 R36_PHY_2.1
NetD6_PHY_3_1: D6_PHY_3.1 R33_PHY_3.1
NetD6_PHY_3_4: D6_PHY_3.4 R36_PHY_3.1
NetD6_PHY_4_1: D6_PHY_4.1 R33_PHY_4.1
NetD6_PHY_4_4: D6_PHY_4.4 R36_PHY_4.1
NetD6_PHY_5_1: D6_PHY_5.1 R33_PHY_5.1
NetD6_PHY_5_4: D6_PHY_5.4 R36_PHY_5.1
NetJ3_L1: J3.L1 R5.2
NetJ3_L3: J3.L3 R4.2
NetQ1_1: Q1.1 R2.2 R3.2
NetQ2_5-6-7-8: Q2.5-6-7-8 Q3.5-6-7-8 U6.1 U6.2
NetQ4_1: Q4.1 R65.2 R66.2
NetQ4_3: Q4.3 R64.1
NetQ5_OR_0_4: Q5_OR_0.4 U7_OR_0.1
NetQ5_OR_1_4: Q5_OR_1.4 U7_OR_1.1
NetQ6_OR_0_4: Q6_OR_0.4 R72_OR_0.2 U7_OR_0.14
NetQ6_OR_1_4: Q6_OR_1.4 R72_OR_1.2 U7_OR_1.14
NetR22_1: R22.1 U1.48
NetR27_PHY_0_1: R27_PHY_0.1 U2_PHY_0.4 | length 3.7
  Top Layer w0.2: R27_PHY_0.1@241.25,243.15 241.25,244 241.75,244.5 U2_PHY_0.4@241.75,246.6
NetR27_PHY_1_1: R27_PHY_1.1 U2_PHY_1.4 | length 3.7
  Top Layer w0.2: R27_PHY_1.1@236.15,230.75 237,230.75 237.5,230.25 U2_PHY_1.4@239.6,230.25
NetR27_PHY_2_1: R27_PHY_2.1 U2_PHY_2.4 | length 3.7
  Top Layer w0.2: R27_PHY_2.1@216.15,230.75 217,230.75 217.5,230.25 U2_PHY_2.4@219.6,230.25
NetR27_PHY_3_1: R27_PHY_3.1 U2_PHY_3.4 | length 3.7
  Top Layer w0.2: R27_PHY_3.1@196.15,230.75 197,230.75 197.477,230.273 199.242,230.273 199.255,230.26 199.59,230.26 U2_PHY_3.4@199.6,230.25
NetR27_PHY_4_1: R27_PHY_4.1 U2_PHY_4.4 | length 3.7
  Top Layer w0.2: R27_PHY_4.1@176.15,230.75 176.154,230.746 177.004,230.746 177.477,230.273 179.242,230.273 179.255,230.26 179.59,230.26 U2_PHY_4.4@179.6,230.25
NetR27_PHY_5_1: R27_PHY_5.1 U2_PHY_5.4 | length 3.5
  Top Layer w0.2: U2_PHY_5.4@184.25,253.4 184.25,256.55 184.45,256.75 R27_PHY_5.1@184.5,256.75
NetR28_PHY_0_1: R28_PHY_0.1 U2_PHY_0.8 | length 3.9
  Top Layer w0.2: U2_PHY_0.8@243.75,246.6 243.74,246.59 243.74,246.24 243.5,246 243.5,244.668 244.203,243.965 244.203,243.47 244.423,243.25 R28_PHY_0.1@244.5,243.25
NetR28_PHY_1_1: R28_PHY_1.1 U2_PHY_1.8 | length 3.9
  Top Layer w0.2: R28_PHY_1.1@236.25,227.5 236.25,227.577 236.47,227.797 236.965,227.797 237.668,228.5 239,228.5 239.24,228.26 239.59,228.26 U2_PHY_1.8@239.6,228.25
NetR28_PHY_2_1: R28_PHY_2.1 U2_PHY_2.8 | length 3.9
  Top Layer w0.2: R28_PHY_2.1@216.25,227.5 216.25,227.577 216.47,227.797 216.965,227.797 217.668,228.5 219,228.5 219.24,228.26 219.59,228.26 U2_PHY_2.8@219.6,228.25
NetR28_PHY_3_1: R28_PHY_3.1 U2_PHY_3.8 | length 3.9
  Top Layer w0.2: R28_PHY_3.1@196.25,227.5 196.25,227.577 196.47,227.797 196.965,227.797 197.668,228.5 199,228.5 199.24,228.26 199.59,228.26 U2_PHY_3.8@199.6,228.25
NetR28_PHY_4_1: R28_PHY_4.1 U2_PHY_4.8 | length 3.9
  Top Layer w0.2: R28_PHY_4.1@176.25,227.5 176.25,227.577 176.47,227.797 176.965,227.797 177.668,228.5 179,228.5 179.24,228.26 179.59,228.26 U2_PHY_4.8@179.6,228.25
NetR28_PHY_5_1: R28_PHY_5.1 U2_PHY_5.8 | length 3.9
  Top Layer w0.2: R28_PHY_5.1@181.5,256.75 181.577,256.75 181.797,256.53 181.797,256.035 182.5,255.332 182.5,254 182.26,253.76 182.26,253.41 U2_PHY_5.8@182.25,253.4
NetR42_PHY_0_1: R42_PHY_0.1 U2_PHY_0.3 | length 4.1
  Top Layer w0.2: R42_PHY_0.1@239.75,243.15 239.825,243.15 240.125,243.45 240.125,243.875 241.25,245 U2_PHY_0.3@241.25,246.6
NetR42_PHY_1_1: R42_PHY_1.1 U2_PHY_1.3 | length 4.1
  Top Layer w0.2: R42_PHY_1.1@236.15,232.25 236.15,232.175 236.45,231.875 236.875,231.875 238,230.75 U2_PHY_1.3@239.6,230.75
NetR42_PHY_2_1: R42_PHY_2.1 U2_PHY_2.3 | length 4.1
  Top Layer w0.2: R42_PHY_2.1@216.15,232.25 216.15,232.175 216.45,231.875 216.875,231.875 218,230.75 U2_PHY_2.3@219.6,230.75
NetR42_PHY_3_1: R42_PHY_3.1 U2_PHY_3.3 | length 4.1
  Top Layer w0.2: R42_PHY_3.1@196.25,232.25 196.25,232.08 196.45,231.88 196.813,231.88 197.943,230.75 U2_PHY_3.3@199.6,230.75
NetR42_PHY_4_1: R42_PHY_4.1 U2_PHY_4.3 | length 4.1
  Top Layer w0.2: R42_PHY_4.1@176.25,232.25 176.25,232.08 176.45,231.88 176.884,231.88 178.014,230.75 U2_PHY_4.3@179.6,230.75
NetR42_PHY_5_1: R42_PHY_5.1 U2_PHY_5.3 | length 4.2
  Top Layer w0.2: U2_PHY_5.3@184.75,253.4 184.75,255.675 185.825,256.75 R42_PHY_5.1@186.25,256.75
NetR43_PHY_0_1: R43_PHY_0.1 U2_PHY_0.47 | length 3.8
  Top Layer w0.2: R43_PHY_0.1@236.15,247 236.4,247.25 238.5,247.25 239,247.75 U2_PHY_0.47@239.6,247.75
NetR43_PHY_1_1: R43_PHY_1.1 U2_PHY_1.47 | length 6.7
  Top Layer w0.2: R43_PHY_1.1@236.15,233.575 236.325,233.75 238.75,233.75 239.5,234.5 240.133,234.5 240.25,234.383 240.25,233.5 240.75,233 U2_PHY_1.47@240.75,232.4
NetR43_PHY_2_1: R43_PHY_2.1 U2_PHY_2.47 | length 6.6
  Top Layer w0.2: R43_PHY_2.1@216.15,233.75 218.75,233.75 219.5,234.5 220.133,234.5 220.25,234.383 220.25,233.5 220.75,233 U2_PHY_2.47@220.75,232.4
NetR43_PHY_3_1: R43_PHY_3.1 U2_PHY_3.47 | length 6.6
  Top Layer w0.2: R43_PHY_3.1@196.15,233.75 198.75,233.75 199.5,234.5 200.133,234.5 200.25,234.383 200.25,233.5 200.75,233 U2_PHY_3.47@200.75,232.4
NetR43_PHY_4_1: R43_PHY_4.1 U2_PHY_4.47 | length 6.6
  Top Layer w0.2: R43_PHY_4.1@176.15,233.75 178.75,233.75 179.5,234.5 180.133,234.5 180.25,234.383 180.25,233.5 180.75,233 U2_PHY_4.47@180.75,232.4
NetR43_PHY_5_1: R43_PHY_5.1 U2_PHY_5.47 | length 3.8
  Top Layer w0.2: U2_PHY_5.47@186.4,252.25 187,252.25 187.5,252.75 189.6,252.75 R43_PHY_5.1@189.85,253
NetR44_PHY_0_1: R44_PHY_0.1 U2_PHY_0.21 | length 3.9
  Top Layer w0.2: U2_PHY_0.21@246.4,251.25 247.357,251.25 247.607,251.5 248.75,251.5 249.125,251.875 249.55,251.875 249.85,252.175 R44_PHY_0.1@249.85,252.25
NetR44_PHY_1_1: R44_PHY_1.1 U2_PHY_1.21 | length 3.9
  Top Layer w0.2: U2_PHY_1.21@244.25,225.6 244.25,224.643 244.5,224.393 244.5,223.25 244.875,222.875 244.875,222.45 245.175,222.15 R44_PHY_1.1@245.25,222.15
NetR44_PHY_2_1: R44_PHY_2.1 U2_PHY_2.21 | length 3.9
  Top Layer w0.2: U2_PHY_2.21@224.25,225.6 224.25,224.643 224.5,224.393 224.5,223.25 224.875,222.875 224.875,222.45 225.175,222.15 R44_PHY_2.1@225.25,222.15
NetR44_PHY_3_1: R44_PHY_3.1 U2_PHY_3.21 | length 3.9
  Top Layer w0.2: U2_PHY_3.21@204.25,225.6 204.25,224.643 204.5,224.393 204.5,223.25 204.875,222.875 204.875,222.45 205.175,222.15 R44_PHY_3.1@205.25,222.15
NetR44_PHY_4_1: R44_PHY_4.1 U2_PHY_4.21 | length 3.9
  Top Layer w0.2: U2_PHY_4.21@184.25,225.6 184.25,224.643 184.5,224.393 184.5,223.25 184.875,222.875 184.875,222.45 185.175,222.15 R44_PHY_4.1@185.25,222.15
NetR44_PHY_5_1: R44_PHY_5.1 U2_PHY_5.21 | length 3.9
  Top Layer w0.2: R44_PHY_5.1@176.15,247.75 176.15,247.825 176.45,248.125 176.875,248.125 177.25,248.5 178.393,248.5 178.643,248.75 U2_PHY_5.21@179.6,248.75
NetR47_2: R47.2 SW1.1
NetR48_2: R48.2 SW2.1
NetR51_1: R51.1 U5.3
NetR52_1: R52.1 U5.5
NetR53_1: R53.1 U5.7
NetR54_1: R54.1 U5.9
NetR55_1: R55.1 U5.11
NetR56_1: R56.1 U5.12
NetR57_1: R57.1 U5.14
NetR58_1: R58.1 U5.16
NetR59_1: R59.1 U5.18
NetR60_1: R60.1 Y3.3
NetR60_2: R60.2 U5.1
NetR74_OR_0_2: R74_OR_0.2 R79_OR_0.2 U7_OR_0.3
NetR74_OR_1_2: R74_OR_1.2 R79_OR_1.2 U7_OR_1.3
NetR78_OR_0_2: R78_OR_0.2 U7_OR_0.11
NetR78_OR_1_2: R78_OR_1.2 U7_OR_1.11
NetR79_OR_0_1: R79_OR_0.1 R80_OR_0.2 U7_OR_0.5
NetR79_OR_1_1: R79_OR_1.1 R80_OR_1.2 U7_OR_1.5
NetR82_TCAN1146_0_1: R82_TCAN1146_0.1 U8_TCAN1146_0.9
NetR82_TCAN1146_1_1: R82_TCAN1146_1.1 U8_TCAN1146_1.9
NetR85_1: R85.1 R86.2 U9.11
NetR89_REG_1_1: R89_REG_1.1 R91_REG_1.2 U10_REG_1.7
NetR89_REG_2_1: R89_REG_2.1 R91_REG_2.2 U10_REG_2.7
NetR89_REG_3_1: R89_REG_3.1 R91_REG_3.2 U10_REG_3.7
NetR90_REG_1_2: R90_REG_1.2 U10_REG_1.3
NetR90_REG_2_2: R90_REG_2.2 U10_REG_2.3
NetR90_REG_3_2: R90_REG_3.2 U10_REG_3.3
NetR95_2: R95.2 U11.4
NetU1_19: U1.19 U3_SJA1150Q_PINOUT_1.M13
NetU1_20: U1.20 U3_SJA1150Q_PINOUT_1.M14
NetU1_21: U1.21 U3_SJA1150Q_PINOUT_1.L13
NetU1_22: U1.22 U3_SJA1150Q_PINOUT_1.L14
NetU1_25: U1.25 U3_SJA1150Q_PINOUT_1.K14
NetU1_26: U1.26 U3_SJA1150Q_PINOUT_1.K13
NetU3_SJA1150Q_PINOUT_0_A2: U3_SJA1150Q_PINOUT_0.A2 U3_SJA1150Q_PINOUT_1.E1
NetU3_SJA1150Q_PINOUT_0_B1: U3_SJA1150Q_PINOUT_0.B1 U3_SJA1150Q_PINOUT_1.F2
NetU3_SJA1150Q_PINOUT_0_C1: U3_SJA1150Q_PINOUT_0.C1 U3_SJA1150Q_PINOUT_1.G2
NetU3_SJA1150Q_PINOUT_0_C2: U3_SJA1150Q_PINOUT_0.C2 U3_SJA1150Q_PINOUT_1.F1
NetU3_SJA1150Q_PINOUT_0_D1: U3_SJA1150Q_PINOUT_0.D1 U3_SJA1150Q_PINOUT_1.E2
NetU3_SJA1150Q_PINOUT_0_D2: U3_SJA1150Q_PINOUT_0.D2 U3_SJA1150Q_PINOUT_1.G1
NetU3_SJA1150Q_PINOUT_0_N4: U3_SJA1150Q_PINOUT_0.N4 U3_SJA1150Q_PINOUT_1.N4
NetU3_SJA1150Q_PINOUT_1_A2: U3_SJA1150Q_PINOUT_0.E1 U3_SJA1150Q_PINOUT_1.A2
NetU3_SJA1150Q_PINOUT_1_B1: U3_SJA1150Q_PINOUT_0.F2 U3_SJA1150Q_PINOUT_1.B1
NetU3_SJA1150Q_PINOUT_1_C1: U3_SJA1150Q_PINOUT_0.G2 U3_SJA1150Q_PINOUT_1.C1
NetU3_SJA1150Q_PINOUT_1_C2: U3_SJA1150Q_PINOUT_0.F1 U3_SJA1150Q_PINOUT_1.C2
NetU3_SJA1150Q_PINOUT_1_D1: U3_SJA1150Q_PINOUT_0.E2 U3_SJA1150Q_PINOUT_1.D1
NetU3_SJA1150Q_PINOUT_1_D2: U3_SJA1150Q_PINOUT_0.G1 U3_SJA1150Q_PINOUT_1.D2
NetU3_SJA1150Q_PINOUT_1_N7: U3_SJA1150Q_PINOUT_1.N7 U4.52
NetU3_SJA1150Q_PINOUT_1_N8: U3_SJA1150Q_PINOUT_1.N8 U4.1
NetU3_SJA1150Q_PINOUT_1_N9: U3_SJA1150Q_PINOUT_1.N9 U4.18
NetU3_SJA1150Q_PINOUT_1_N10: U3_SJA1150Q_PINOUT_1.N10 U4.32
NetU3_SJA1150Q_PINOUT_1_N11: U3_SJA1150Q_PINOUT_1.N11 U4.34
NetU3_SJA1150Q_PINOUT_1_N12: U3_SJA1150Q_PINOUT_1.N12 U4.31
NetU3_SJA1150Q_PINOUT_1_P7: U3_SJA1150Q_PINOUT_1.P7 U4.51
NetU3_SJA1150Q_PINOUT_1_P8: U3_SJA1150Q_PINOUT_1.P8 U4.17
NetU3_SJA1150Q_PINOUT_1_P9: U3_SJA1150Q_PINOUT_1.P9 U4.47
NetU3_SJA1150Q_PINOUT_1_P10: U3_SJA1150Q_PINOUT_1.P10 U4.23
NetU3_SJA1150Q_PINOUT_1_P11: U3_SJA1150Q_PINOUT_1.P11 U4.33
NetU3_SJA1150Q_PINOUT_1_P12: U3_SJA1150Q_PINOUT_1.P12 U4.35
NetU4_2: U4.2
NetU4_3: U4.3
NetU4_4: U4.4
NetU4_5: U4.5
NetU4_7: U4.7
NetU4_15: U4.15
NetU4_22: U4.22
NetU4_25: U4.25
NetU4_28: U4.28
NetU4_29: U4.29
NetU4_30: U4.30
NetU4_36: U4.36
NetU4_37: U4.37
NetU4_38: U4.38
NetU4_39: U4.39
NetU4_40: U4.40
NetU4_41: U4.41
NetU4_42: U4.42
NetU4_43: U4.43
NetU4_44: U4.44
NetU4_45: U4.45
NetU4_46: U4.46
NetU4_53: U4.53
NetU4_54: U4.54
NetU4_55: U4.55
NetU4_56: U4.56
NetU4_57: U4.57
NetU4_58: U4.58
NetU4_59: U4.59
NetU4_60: U4.60
NetU4_61: U4.61
NetU4_62: U4.62
NetU4_63: U4.63
NetU4_64: U4.64
NetU4_65: U4.65
NetU4_66: U4.66
NetU4_67: U4.67
NetU4_68: U4.68
NetU4_69: U4.69
NetU4_70: U4.70
NetU4_71: U4.71
NetU4_77: U4.77
NetU4_78: U4.78
NetU4_79: U4.79
NetU4_80: U4.80
NetU4_81: U4.81
NetU4_82: U4.82
NetU4_83: U4.83
NetU4_84: U4.84
NetU4_85: U4.85
NetU4_86: U4.86
NetU4_87: U4.87
NetU4_88: U4.88
NetU4_90: U4.90
NetU4_91: U4.91
NetU4_92: U4.92
NetU4_93: U4.93
NetU4_95: U4.95
NetU4_96: U4.96
NetU4_97: U4.97
NetU4_98: U4.98
P0_TRX_N: C32_PHY_0.2 J1.6-2 R23_PHY_0.2 | length 2
  Top Layer w0.123: v1(227.75,250.375) 227.797,250.375 228.011,250.162 228.903,250.162 228.975,250.234 228.975,250.475 229.25,250.75 C32_PHY_0.2@229.271,250.75
P0_TRX_P: C31_PHY_0.2 J1.6-1 R24_PHY_0.2 | length 2
  Top Layer w0.123: v1(227.75,249.625) 227.797,249.625 228.011,249.838 228.903,249.838 228.975,249.766 228.975,249.525 229.25,249.25 C31_PHY_0.2@229.271,249.25
P1_GND: C1.1 C2.1 C3.1 C4.1 J1.1 J1.2 J1.3 J1.4
P1_TRX_N: C32_PHY_1.2 J1.1-2 R23_PHY_1.2 | length 2
  Top Layer w0.123: v1(234.25,237.875) 234.297,237.875 234.511,237.662 235.403,237.662 235.475,237.734 235.475,237.975 235.75,238.25 C32_PHY_1.2@235.771,238.25
P1_TRX_P: C31_PHY_1.2 J1.1-1 R24_PHY_1.2 | length 2
  Top Layer w0.123: v1(234.25,237.125) 234.297,237.125 234.511,237.338 235.403,237.338 235.475,237.266 235.475,237.025 235.75,236.75 C31_PHY_1.2@235.771,236.75
P2_TRX_N: C32_PHY_2.2 J1.5-2 R23_PHY_2.2 | length 2
  Top Layer w0.123: v1(214.25,237.875) 214.297,237.875 214.511,237.662 215.403,237.662 215.475,237.734 215.475,237.975 215.75,238.25 C32_PHY_2.2@215.771,238.25
P2_TRX_P: C31_PHY_2.2 J1.5-1 R24_PHY_2.2 | length 2
  Top Layer w0.123: v1(214.25,237.125) 214.297,237.125 214.511,237.338 215.403,237.338 215.475,237.266 215.475,237.025 215.75,236.75 C31_PHY_2.2@215.771,236.75
P3_TRX_N: C32_PHY_3.2 J1.2-2 R23_PHY_3.2
P3_TRX_P: C31_PHY_3.2 J1.2-1 R24_PHY_3.2 | length 2
  Top Layer w0.123: C31_PHY_3.2@210.229,238.25 210.25,238.25 210.525,237.975 210.525,237.734 210.597,237.662 211.489,237.662 211.703,237.875 v1(211.75,237.875)
P4_TRX_N: C32_PHY_4.2 J1.3-2 R23_PHY_4.2 | length 2
  Top Layer w0.123: C32_PHY_4.2@190.229,236.75 190.25,236.75 190.525,237.025 190.525,237.266 190.597,237.338 191.489,237.338 191.703,237.125 v1(191.75,237.125)